# Altium PCB Thermostat_EEM_Breakout.PCBDOC
Units mm, origin at the board's own origin, x right, y up, seen from the top; angles counter-clockwise.
Board outline 44.91 x 73.5 mm, 4 copper layers (TOP, G1, L2, BOT), stack 1.55 mm thick; 66 components, 42 nets, 369 pads, 18 vias.
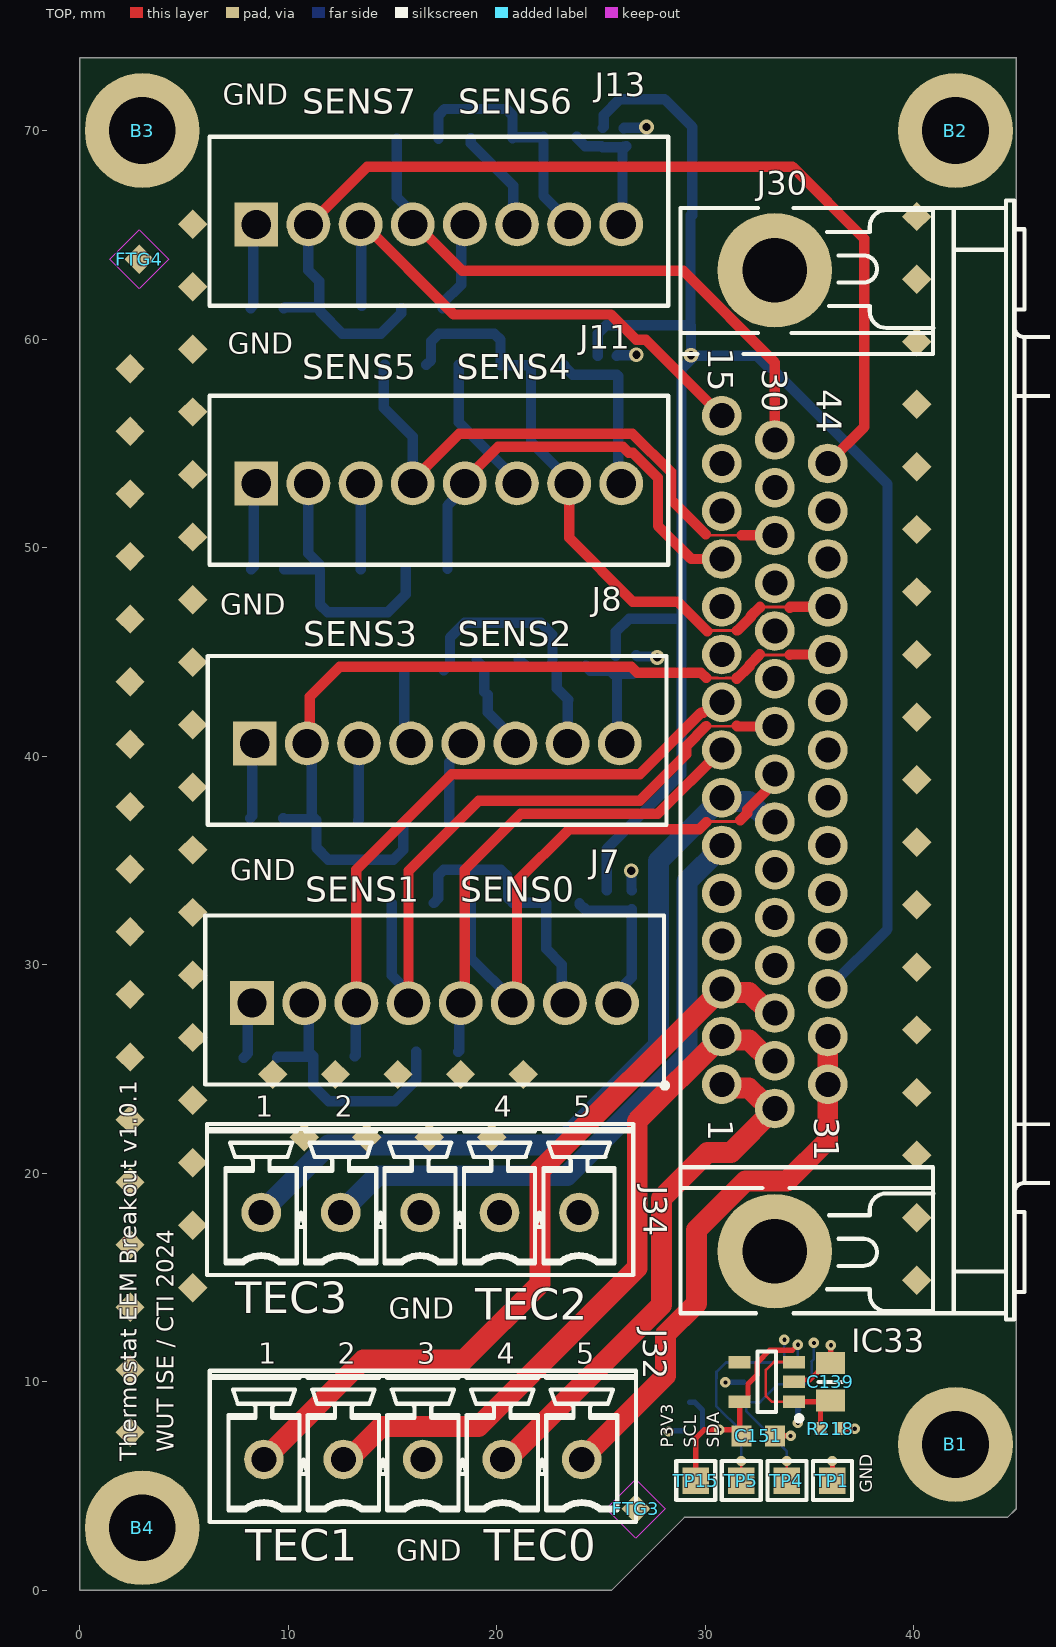
[diagram p0: TOP view]
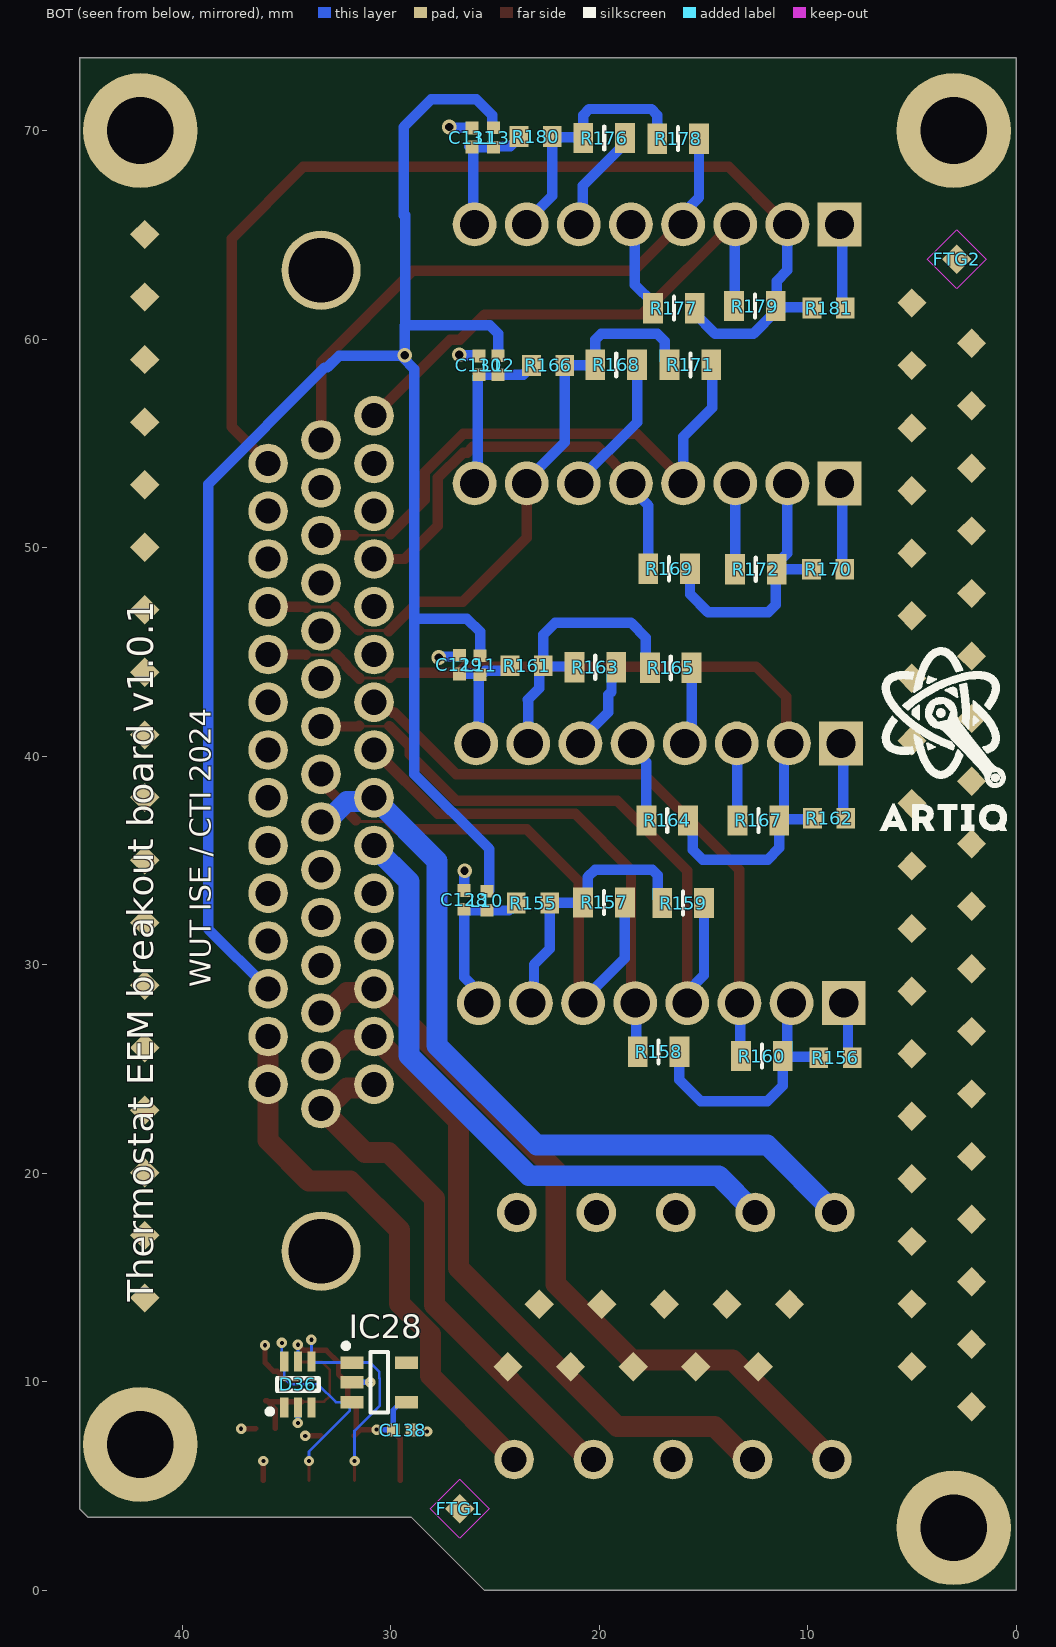
[diagram p1: BOT view, seen from below]
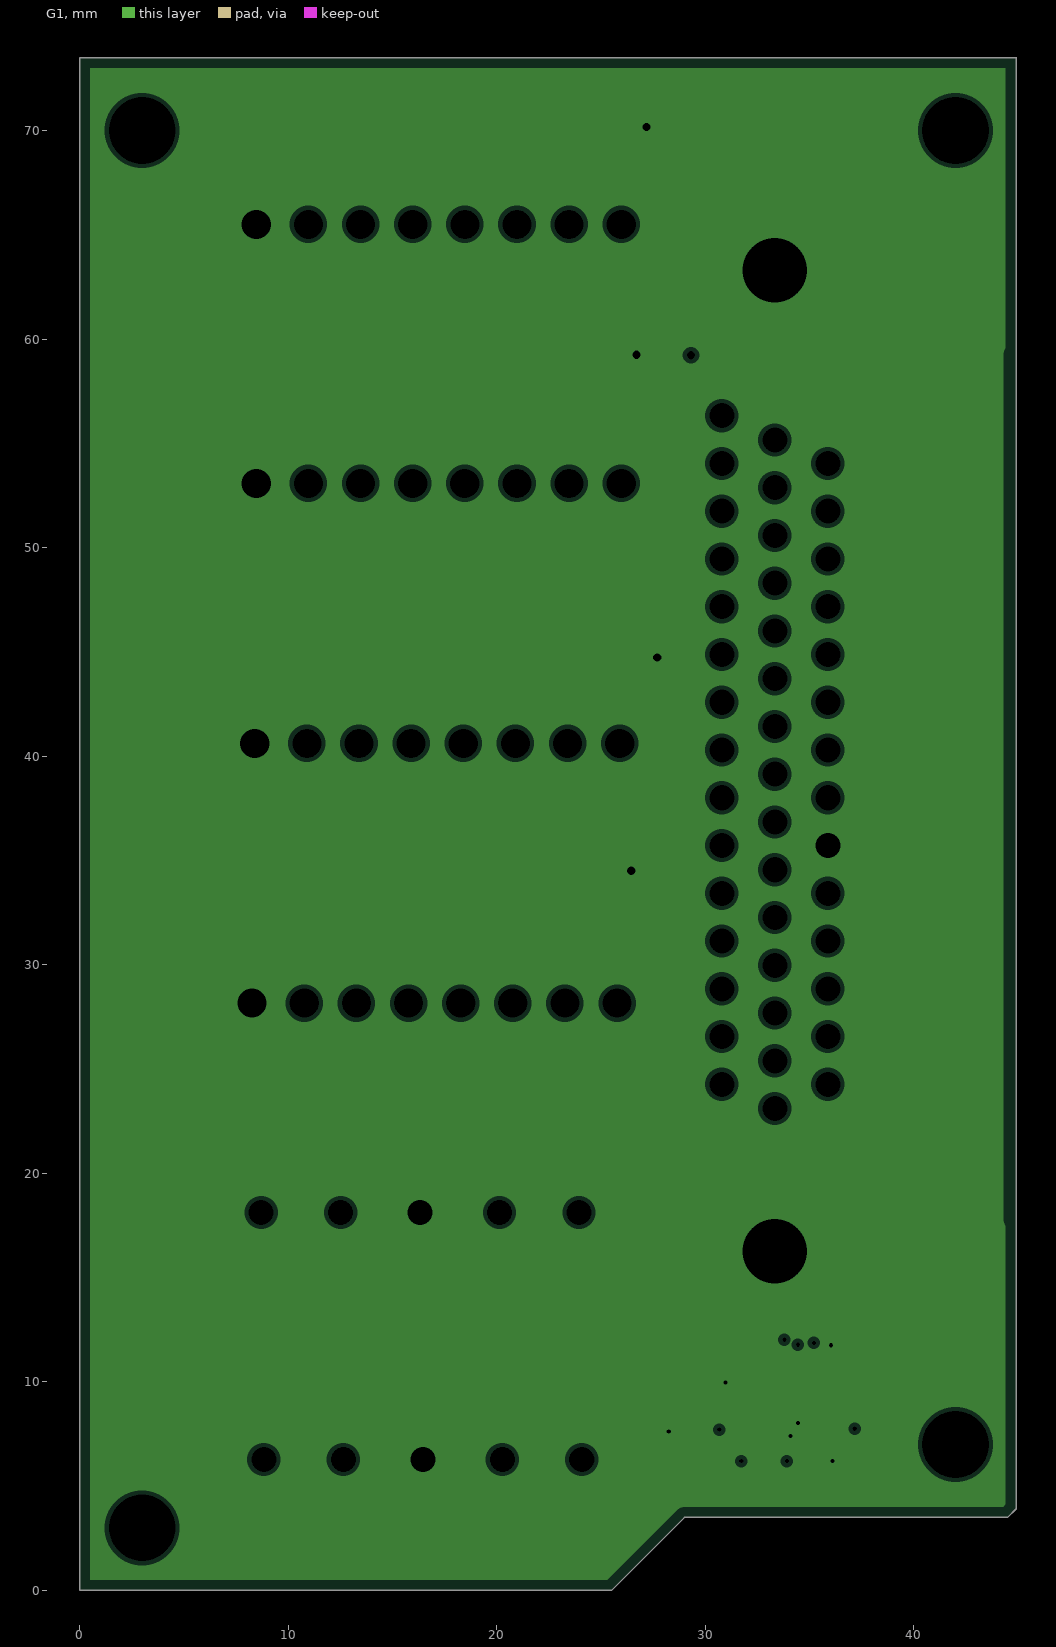
[diagram p2: G1, clearances drawn from the general rule]
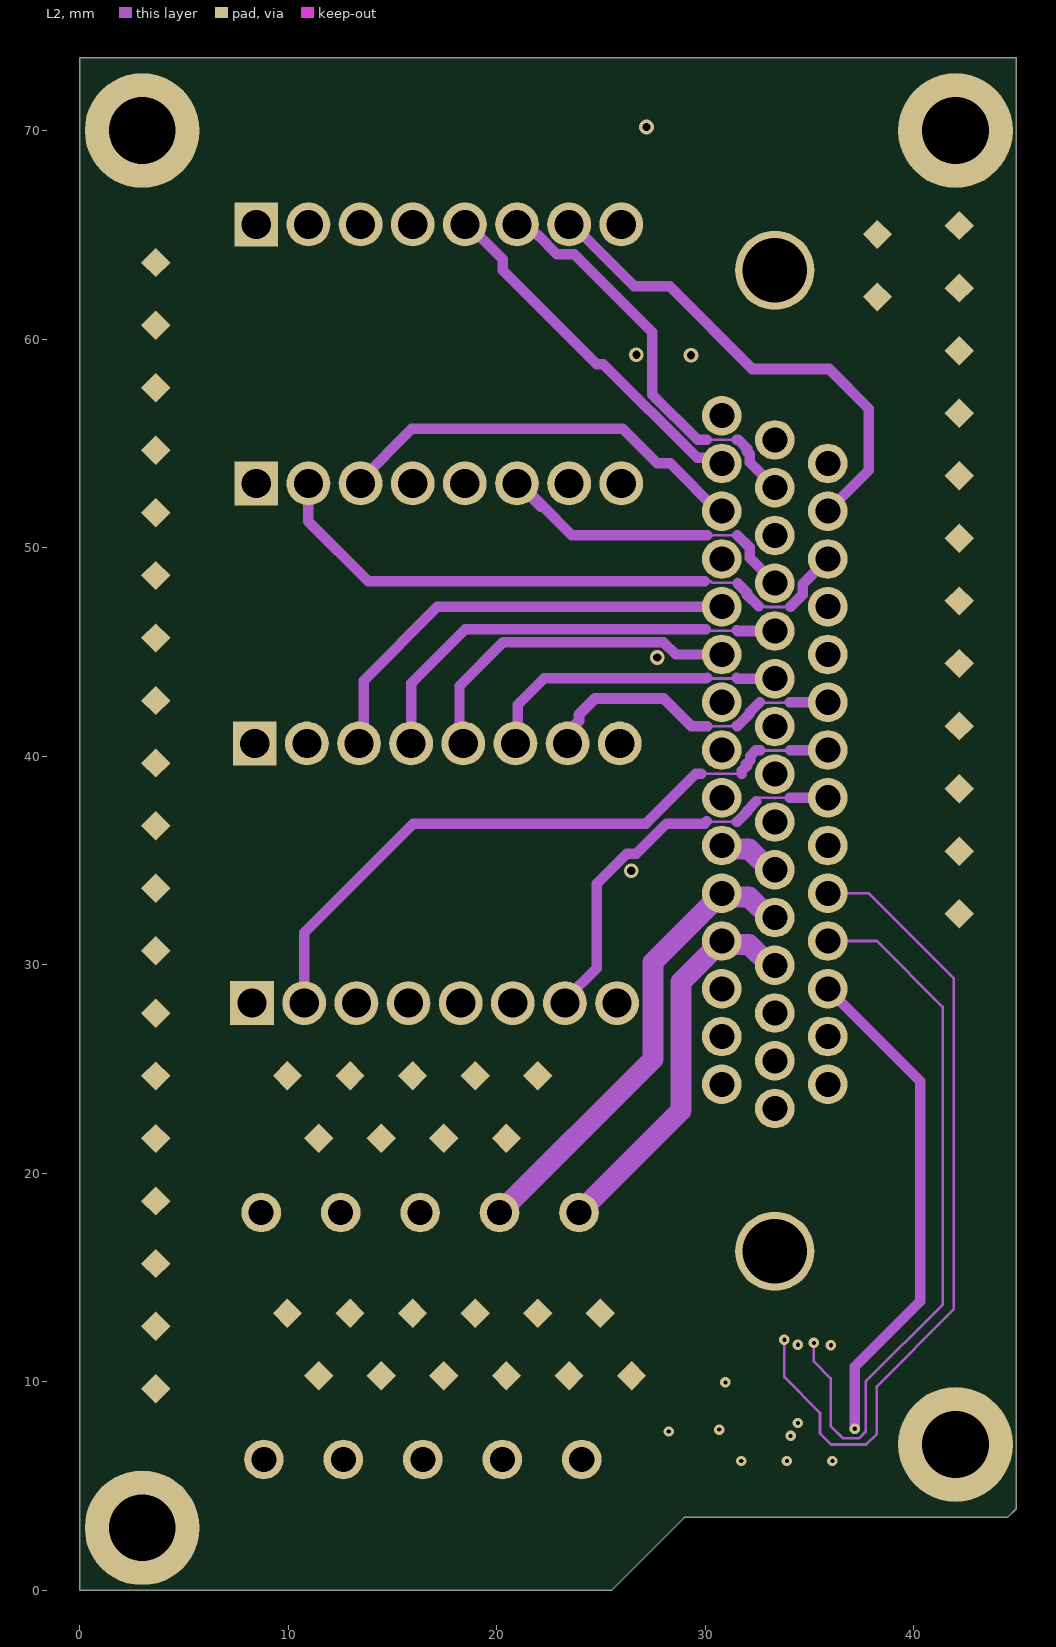
[diagram p3: L2]

## Layer stack, top to bottom
TopSolder: solder mask 0.01, Solder Resist, Dk 3.5
TOP: signal copper 0.035
Dielectric1: prepreg 0.18, FR-4, Dk 4.8
G1: plane copper 0.035, net GND
Dielectric2: core 1.05, Core-042, Dk 4.6
L2: signal copper 0.035
Dielectric3: prepreg 0.18, FR-4, Dk 4.8
BOT: signal copper 0.035
BottomSolder: solder mask 0.01, Solder Resist, Dk 3.5

## Board outline
0,0 0,73.5 44.901,73.5 44.913,73.487 44.913,3.913 44.5,3.5 29,3.5 25.5,0

## Design rules (kind name [scope] priority, off if disabled: settings)
AcuteAngle [All] p1: minimum=6.00000000000000E+0001 checktracksonly=FALSE
Clearance Clearance_HV [InNetClass('HV') vs not InNetClass('HV')] p1: gap=1 ignorepadtopadclearanceinfootprint=FALSE
Clearance Clearance_balancing [InNamedPolygon('balancing')] p2: gap=1.27 ignorepadtopadclearanceinfootprint=FALSE except(0.635: Via-Via Via-Fill Via-Poly Via-Region Via-Text Via-Hole)
Clearance Clearance_DIFF [(InDifferentialPairClass('All Differential Pairs')and IsTrack ) vs (InDifferentialPairClass('All Differential Pairs') and IsTrack  )] p3 off: gap=0.508 ignorepadtopadclearanceinfootprint=FALSE except(0: Arc-Hole Track-Hole SMDPad-Hole THPad-Hole Via-Hole Fill-Hole Poly-Hole Region-Hole Text-Hole; 0.127: SMDPad-SMDPad SMDPad-THPad SMDPad-Via SMDPad-Fill SMDPad-Poly SMDPad-Region SMDPad-Text THPad-THPad THPad-Via THPad-Fill THPad-Poly THPad-Region THPad-Text Via-Via Via-Fill Via-Poly Via-Region Via-Text)
Clearance [All] p4: gap=0.127 ignorepadtopadclearanceinfootprint=FALSE except(0: Arc-Hole Track-Hole SMDPad-Hole THPad-Hole Via-Hole Fill-Hole Poly-Hole Region-Hole Text-Hole; 0.203: Arc-Poly Track-Poly SMDPad-Poly THPad-Poly Via-Poly Fill-Poly Poly-Poly)
ComponentClearance [All] p1: gap=0 collisioncheckmode=3 verticalgap=0 showdistances=FALSE
DiffPairsRouting [All] p1: maxlimit=0.152 minlimit=0.127 mostfreqgap=0.152 toplayer_minwidth=0.127 toplayer_maxwidth=0.17 toplayer_prefwidth=0.152 midlayer1_minwidth=0.127 midlayer1_maxwidth=0.152 midlayer1_prefwidth=0.152 bottomlayer_minwidth=0.127 bottomlayer_maxwidth=0.17 bottomlayer_prefwidth=0.152 maxuncoupledlength=12.7
FabricationTestPointUsage TestPointUsage [All] p1: valid=0 allowmultiple=FALSE
FabricationTestpoint Testpoint [All] p1: side=3 testpointundercomponent=TRUE minsize=1.016 maxsize=2.54 preferedsize=1.524 minholesize=0.508 maxholesize=1.016 preferedholesize=0.813 testpointgrid=0.025 allowsidetop=TRUE allowsidebottom=TRUE usegrid=TRUE gridtolerance=0
Height [All] p1: minheight=0 maxheight=40 prefheight=40
HoleSize [All] p1: absolutevalues=TRUE maxlimit=3.81 minlimit=0.025 maxpercent=80.000 minpercent=20.000
HoleToHoleClearance [All] p1: gap=0.025 allowstackedmicrovias=TRUE
MinimumSolderMaskSliver [All] p1: minsoldermaskwidth=0
PlaneClearance PlaneClearance_HV [InNetClass('HV')] p1: clearance=1
PlaneClearance [All] p2: clearance=0.2
PlaneConnect [All] p1: pad.planeconnectstyle=Relief pad.reliefexpansion=0.254 pad.reliefentries=4 pad.reliefconductorwidth=0.254 pad.reliefairgap=0.152 via.planeconnectstyle=Direct via.reliefexpansion=0.508 via.reliefentries=4 via.reliefconductorwidth=0.254 via.reliefairgap=0.254
PolygonConnect PolygonConnect_Power [InComponent('C155') or InComponent('C156') or  InComponent('C157') or  InComponent('C158') or InComponent('C163') or InComponent('C164')  or InComponent('C165')or InComponent('C167') or InComponent('L2_1')  or InComponent('L2_2') or InComponent('L2_3') or InComponent('L2_4')    or InComponent('L4_1')  or InComponent('L4_2') or InComponent('L4_3') or InComponent('L4_4')] p1: connectstyle=Relief reliefconductorwidth=0.4 reliefentries=4 polygonreliefangle="90 Angle" airgapwidth=0.254
PolygonConnect PolygonConnect_BGA [HasFootprint('LGA25C127P5X5_625X625X192')] p2: connectstyle=Direct reliefconductorwidth=0.254 reliefentries=4 polygonreliefangle="90 Angle" airgapwidth=0.254
PolygonConnect PolygonConnect_pad [All] p3: thpad.connectstyle=Relief thpad.reliefconductorwidth=0.254 thpad.reliefentries=4 thpad.polygonreliefangle="90 Angle" thpad.airgapwidth=0.152 smdpad.connectstyle=Relief smdpad.reliefconductorwidth=0.254 smdpad.reliefentries=4 smdpad.polygonreliefangle="90 Angle" smdpad.airgapwidth=0.152 via.connectstyle=Direct via.reliefconductorwidth=0.254 via.reliefentries=4 via.polygonreliefangle="90 Angle" via.airgapwidth=0.152
RoomDefinition Thermostat_EEM_Breakout [InComponentClass('Thermostat_EEM_Breakout')] p1: confinementstyle=ConfineIn formatcopy=TRUE lockcomponents=FALSE outline 116.096,61.75 69.596,61.75 69.596,44 116.096,44
RoutingVias RoutingVias_HPOW [InNetClass('HPOW')] p1: holewidth=0.711 width=1.27 viastyle="Through Hole" minholewidth=0.711 minwidth=1.27 maxholewidth=0.711 maxwidth=1.27 useviatemplates=TRUE viatemplateguid#1={C4BC9E51-A50C-4827-9BB3-4603308538B4} viatemplateguid#2={CC3703E4-4F4D-4ECC-8BAE-5075FE03B580} viatemplateguid#3={B5D767B0-96F0-490E-9621-DF468C9DD5C8} viatemplatename#1=v50h20m0mx0 viatemplatename#2=v70h40m0mx0 viatemplatename#3=v66h33m0mx0
RoutingVias [All] p2: holewidth=0.2 width=0.5 viastyle="Through Hole" minholewidth=0.2 minwidth=0.5 maxholewidth=1 maxwidth=2 useviatemplates=TRUE viatemplateguid#1={C4BC9E51-A50C-4827-9BB3-4603308538B4} viatemplateguid#2={CC3703E4-4F4D-4ECC-8BAE-5075FE03B580} viatemplateguid#3={A86ABFB5-DEF7-4A39-8B53-0CFF0DEED7D0} viatemplateguid#4={09B06083-E995-414E-AB37-2F7DC4B9C6DF} viatemplateguid#5={C0EBE885-0A75-4383-AABD-E9C68A6ADC0C} viatemplateguid#6={B5D767B0-96F0-490E-9621-DF468C9DD5C8} viatemplateguid#7={4937D8D9-3ACA-4365-854C-C932E18BD1B1} viatemplatename#1=v50h20m0mx0 viatemplatename#2=v70h40m0mx0 viatemplatename#3=v60h30 viatemplatename#4=v60h30m0mx0 viatemplatename#5=v60h30m0mx0(1) viatemplatename#6=v66h33m0mx0 viatemplatename#7=v50h20m55mx0
SilkToSilkClearance [All] p1: silktosilkclearance=0
SilkToSolderMaskClearance SilkscreenOverComponentPads [IsPad] p1: minsilkscreentomaskgap=0 clearancetoexposedcopper=TRUE
SolderMaskExpansion [All] p1: expansion=0.015 istentingtop=FALSE
ViasUnderSMD ViasUnderSMD_QFN [HasFootprint('TSSOP28-EP')  or InComponent('IC11') or InComponent('IC18')  or InComponent('IC15') or InComponent('S1') or InComponent('S2') or InComponent('S3') or InComponent('S4')] p1: allowed=TRUE
ViasUnderSMD [All] p2: allowed=FALSE
Width Width_HPOW [InNetClass('HPOW')] p1: maxlimit=4 minlimit=0.254 preferedwidth=0.5
Width [All] p2: maxlimit=1.27 minlimit=0.127 preferedwidth=0.127
18 further rules are at their usual default settings.

## Components (designator, comment, footprint, x,y, rotation, side; value= is the part's Value field where it differs from the comment)
B1 "Plated Hole" MTG320_550#1 87.351,-11.091 r90 top
B2 "Plated Hole" MTG320_550#2 80.551,-11.091 r90 top
B3 "Plated Hole" MTG320_550#3 73.751,-11.091 r90 top
B4 "Plated Hole" MTG320_550#4 66.95,-11.091 r90 top
C128 "100nF" CAPC1005X55N 26.473,33.114 r270 bottom
C129 "100nF" CAPC1005X55N 26.702,44.391 r270 bottom
C130 "100nF" CAPC1005X55N 25.762,58.742 r270 bottom
C131 "100nF" CAPC1005X55N 26.092,69.664 r270 bottom
C138 "100nF" CAPC1005X55N 29.422,7.687 r0 bottom
C139 "10uF" CAPC2012X135N 36,10 r90 top
C151 "1uF" CAPC1608X87N 32.542,7.411 r180 top
D36 "DRTR5V0U4S-7" SOT65P210X110-6N 34.443,9.877 r90 bottom
FTG1 "Use only in PCB" FIDUCIAL_TOP_S100-200 26.679,3.912 r90 bottom
FTG2 "Use only in PCB" FIDUCIAL_TOP_S100-200 2.858,63.827 r90 bottom
FTG3 "Use only in PCB" FIDUCIAL_TOP_S100-200 26.679,3.912 r90 top
FTG4 "Use only in PCB" FIDUCIAL_TOP_S100-200 2.858,63.827 r90 top
IC28 "24AA02E48T-I/OT" SOT95P280X145-5N 30.543,9.977 r180 bottom
IC33 "ADP150AUJZ-3.3-R7" SOT95P280X90-5N 32.95,10 r180 top
J7 "691382000008" 691382000008 17.023,28.312 r0 top
J8 "691382000008" 691382000008 17.148,40.763 r0 top
J11 "691382000008" 691382000008 17.223,53.232 r0 top
J13 "691382000008" 691382000008 17.225,65.653 r0 top
J17 "691381000008" WURTH_691381000008 -5.854,-26.627 r270 top
J18 "691381000008" WURTH_691381000008 -27.952,-26.246 r270 top
J28 "691381000008" WURTH_691381000008 -27.037,-12.809 r270 top
J29 "691381000008" WURTH_691381000008 16.067,-26.195 r270 top
J30 "D-Sub" AMPHENOL_10090926-P444XLF 33.336,39.788 r270 top locked
J31 "" PHOENIX_1803604 -1.104,-6.917 r270 top
J32 "" PHOENIX_1803455 16.459,6.28 r0 top
J33 "" PHOENIX_1803604 15.736,-31.809 r90 top
J34 "" PHOENIX_1803455 16.328,18.119 r0 top
L10 "220R@100MHz" INDC1005X55N 25.381,33.063 r90 bottom
L11 "220R@100MHz" INDC1005X55N 25.711,44.366 r90 bottom
L12 "220R@100MHz" INDC1005X55N 24.847,58.742 r90 bottom
L13 "220R@100MHz" INDC1005X55N 25.076,69.664 r90 bottom
R155 "0" RESC1608X55N 23.171,32.961 r0 bottom
R156 "0" RESC1608X55N 8.668,25.545 r0 bottom
R157 "5k" RESC2013X64N 19.767,32.987 r0 bottom
R158 "5k" RESC2013X64N 17.151,25.824 r180 bottom
R159 "5k" RESC2013X64N 15.973,32.961 r0 bottom
R160 "5k" RESC2013X64N 12.198,25.621 r180 bottom
R161 "0" RESC1608X55N 23.476,44.341 r0 bottom
R162 "0" RESC1608X55N 8.972,37.025 r0 bottom
R163 "5k" RESC2013X64N 20.183,44.264 r0 bottom
R164 "5k" RESC2013X64N 16.735,36.924 r180 bottom
R165 "5k" RESC2013X64N 16.567,44.239 r0 bottom
R166 "0" RESC1608X55N 22.447,58.742 r0 bottom
R167 "5k" RESC2013X64N 12.36,36.924 r180 bottom
R168 "5k" RESC2013X64N 19.183,58.768 r0 bottom
R169 "5k" RESC2013X64N 16.643,48.989 r180 bottom
R170 "0" RESC1608X55N 9.023,48.963 r0 bottom
R171 "5k" RESC2013X64N 15.627,58.768 r0 bottom
R172 "5k" RESC2013X64N 12.487,48.963 r180 bottom
R176 "5k" RESC2013X64N 19.758,69.639 r0 bottom
R177 "5k" RESC2013X64N 16.415,61.486 r180 bottom
R178 "5k" RESC2013X64N 16.211,69.614 r0 bottom
R179 "5k" RESC2013X64N 12.528,61.587 r180 bottom
R180 "0" RESC1608X55N 23.044,69.715 r0 bottom
R181 "0" RESC1608X55N 8.998,61.486 r0 bottom
R218 "33" RESC1005X40N 36,7.761 r180 top
SCREW1 "09670009972" 3M_3341-31 56.105,15.884 r0 top
SCREW2 "09670009972" 3M_3341-31 56.175,63.9 r0 top
TP1 "Test Point" TPS127 36.1,5.27 r90 top
TP4 "Test Point" TPS127 33.914,5.27 r90 top
TP5 "Test Point" TPS127 31.728,5.27 r90 top
TP15 "Test Point" TPS127 29.542,5.27 r90 top

## Footprints (in the part's own frame and the unit in brackets; to place one, negate y for a bottom-side part, rotate by r counter-clockwise, add the part's x,y. Pads: shape width x height; smd on the part's side, far side on the other; paste and mask are expansions set on the pad)
3M_3341-31 [mm] "MDR Female Screw Locks : Thread Length= 3.8mm, Thread Size: M2.5"
  silkscreen extent -4.04,-2.74 5.26,2.74, body extent -9.01,-2.74 5.26,2.74, height 2.37
691382000008 [mm] "Vertical PCB Header, pitch 2.5mm, 08p"
  rect 2.1x2.1 hole 1.4: 1(-8.75,-0.15)
  round 2.1 hole 1.4: 2(-6.25,-0.15) 3(-3.75,-0.15) 4(-1.25,-0.15) 5(1.25,-0.15) 6(3.75,-0.15) 7(6.25,-0.15) 8(8.75,-0.15)
  silkscreen extent -11,-4.05 11,4.05, body extent -11,-4.05 11,4.05, height 10.14
AMPHENOL_10090926-P444XLF [mm] "Right Angle High Density D-sub 44 Male Contacts with Harpoons + UNC 4-40 Clinchnuts + Electrical Continuity"
  round 1.9 hole 1.2: 1(15.52,-2.54) 2(13.23,-2.54) 3(10.94,-2.54) 4(8.65,-2.54) 5(6.36,-2.54) 6(4.07,-2.54) 7(1.78,-2.54) 8(-0.51,-2.54) 9(-2.8,-2.54) 10(-5.09,-2.54) 11(-7.38,-2.54) 12(-9.67,-2.54) 13(-11.96,-2.54) 14(-14.25,-2.54) 15(-16.54,-2.54) 16(16.682,0) 17(14.392,0) 18(12.102,0) 19(9.812,0) 20(7.522,0) 21(5.232,0) 22(2.942,0) 23(0.652,0) 24(-1.638,0) 25(-3.928,0) 26(-6.218,0) 27(-8.508,0) 28(-10.798,0) 29(-13.088,0) 30(-15.378,0) 31(15.52,2.54) 32(13.23,2.54) 33(10.94,2.54) 34(8.65,2.54) 35(6.36,2.54) 36(4.07,2.54) 37(1.78,2.54) 38(-0.51,2.54) 39(-2.8,2.54) 40(-5.09,2.54) 41(-7.38,2.54) 42(-9.67,2.54) 43(-11.96,2.54) 44(-14.25,2.54)
  round 5.5 / inner round 3.8 / far side round 3.8 hole 3.1: 45(-23.513,0) 46(23.527,0)
  silkscreen extent -26.86,-5.4 26.8,17.18, body extent -26.86,-4.57 26.8,17.13, height 12.55
CAPC1005X55N [mm] "Capacitor, Non-Polarized, Chip; 1.00mm L X 0.50mm W X 0.70mm H, IPC Medium Density"
  rect 0.62x0.62 smd: 1(-0.45,0) 2(0.45,0)
  body extent -0.52,-0.27 0.53,0.28, height 0.55
CAPC1608X87N [mm] "Chip Capacitor, Body 1.6x0.8mm IPC Medium Density"
  rect 0.95x1 smd: 1(-0.8,0) 2(0.8,0)
  body extent -0.87,-0.47 0.88,0.48, height 0.87
CAPC2012X135N [mm] "Chip Capacitor, Body 2.0x1.25mm, IPC Medium Density"
  rect 1.05x1.4 smd: 1(-0.9,0) 2(0.9,0)
  silkscreen extent 0,-0.58 0,0.58, body extent -1.05,-0.67 1.05,0.68, height 1.25
FIDUCIAL_TOP_S100-200 [mm] "Square Fiducial Target, Top Layer, 1.0mm, Top Solder 2.0mm, Keepout =2.0mm"
  rect 1x1 smd rot 45 paste-0.51 mask+0.5: 1(0,0)
  TOP keep-out region: 1.414,0 0,-1.414 -1.414,0 0,1.414
INDC1005X55N [mm] "Chip Inductor, 2-Leads, EIA 0402, Metric 1005, Body 1x0.5mm, 0402IPC Medium Density"
  rect 0.6x0.62 smd: 1(-0.46,0) 2(0.46,0)
  body extent -0.52,-0.27 0.53,0.28, height 0.55
MTG320_550#1 [mm] "Plated Through Hole: Hole Dia.=3.2mm Pad Dia.=5.5mm"
  round 5.5 hole 3.2: 1(18.091,45.351)
MTG320_550#2 [mm] "Plated Through Hole: Hole Dia.=3.2mm Pad Dia.=5.5mm"
  round 5.5 hole 3.2: 1(81.091,38.551)
MTG320_550#3 [mm] "Plated Through Hole: Hole Dia.=3.2mm Pad Dia.=5.5mm"
  round 5.5 hole 3.2: 1(81.091,70.751)
MTG320_550#4 [mm] "Plated Through Hole: Hole Dia.=3.2mm Pad Dia.=5.5mm"
  round 5.5 hole 3.2: 1(14.091,63.95)
PHOENIX_1803455 [mm] "PCB Header, 8A, 160 V, Pitch: 3.81mm, 5 Positions, MCV Serie"
  round 1.9 hole 1.2: 1(-7.62,0) 2(-3.81,0) 3(0,0) 4(3.81,0) 5(7.62,0)
  silkscreen extent -10.22,-3 10.22,4.25, body extent -10.22,-3 10.22,4.25, height 9.2
PHOENIX_1803604 [mm] "3.85 5 way connector"
  silkscreen extent 7.82,-12.17 17.32,7.72, body extent 7,-12.17 18.1,7.67, height 18.6
RESC1005X40N [mm] "Chip Resistor, EIA 0402, Metric 1005, Body 1.0x0.5mm, IPC Medium Density"
  rect 0.58x0.62 smd: 1(-0.47,0) 2(0.47,0)
  body extent -0.52,-0.27 0.53,0.28, height 0.4
RESC1608X55N [mm] "Chip Resistor, EIA 0603, Metric 1608, Body 1.6x0.8mm, IPC Medium Density"
  rect 0.9x1 smd: 1(-0.8,0) 2(0.8,0)
  body extent -0.87,-0.47 0.88,0.48, height 0.55
RESC2013X64N [mm] "Chip Resistor, EIA 0805, Metric 2013, Body 2.03x1.27mm, IPC Medium Density"
  rect 0.95x1.45 smd: 1(-1,0) 2(1,0)
  silkscreen extent 0,-0.55 0,0.55, body extent -1.02,-0.63 1.02,0.64, height 0.64
SOT65P210X110-6N [mm] "SOT363, SC70-6, SOT, 0.65mm Pitch, 6 Pin, 1.25mm W X 2.00mm L X 1.10mm H, IPC Medium Density"
  rect 0.95x0.4 smd: 1(-1.1,0.65) 2(-1.1,0) 3(-1.1,-0.65) 4(1.1,-0.65) 5(1.1,0) 6(1.1,0.65)
  silkscreen extent -1.42,-1 0.3,1.48, body extent -1.2,-1.1 1.2,1.1, height 1.1
SOT95P280X90-5N [mm] "SOT, 0.95mm Pitch; 5 Pin, 1.60mm W X 2.90mm L X 0.90mm H body, IPC Medium"
  rect 1.05x0.6 smd: 1(-1.3,0.95) 2(-1.3,0) 3(-1.3,-0.95) 4(1.3,-0.95) 5(1.3,0.95)
  silkscreen extent -1.68,-1.45 0.45,1.87, body extent -1.4,-1.5 1.4,1.5, height 0.9
SOT95P280X145-5N [mm] "SOT, 0.95mm pitch; 5 pin, 1.60mm W X 2.90mm L X 1.45mm H body, IPC Medium Density"
  rect 1.1x0.6 smd: 1(-1.3,0.95) 2(-1.3,0) 3(-1.3,-0.95) 4(1.3,-0.95) 5(1.3,0.95)
  silkscreen extent -1.73,-1.45 0.43,1.87, body extent -1.4,-1.5 1.4,1.5, height 1.45
TPS127 [mm] "1.27 x  1.27mm SMD Test Point Area"
  rect 1.27x1.27 smd paste-1.27: 1(0,0)
  silkscreen extent -0.94,-0.94 0.94,0.94
WURTH_691381000008 [mm] "2.5mm 8 way connector"
  silkscreen extent -0.02,-9.63 11.62,10.98, body extent -0.03,-9.6 11.77,11, height 23.6

## Part data
B1 B2 B3 B4: library part PLATED_HOLE3.2_PAD5.5, "Single Terminal Socket", Author="CERN DEM JMW", Component Type="Standard (No BOM)", ComponentHeight=0mm, CreateDate=01.10.2012, Family="Plated Hole", HelpURL=Undefined, LatestRevisionDate=01.10.2012, Mounted=No, PackageDescription="Plated Through Hole: Hole Dia.=3.2mm Pad Dia.=5.5mm", Part Description="Plated Through Hole: Hole Dia.=3.2mm Pad Dia.=5.5mm", Part Number=PLATED_HOLE3.2_PAD5.5, Pin Count=1, Sense=No, SMD=No, Socket=No, Status=None
C128 C129 C130 C131 C138: library part CC0402_100NF_16V_10%_X5R, "Non-polarised capacitor", Case=0402, Manufacturer=GENERIC, Manufacturer1 ComponentHeight=0.55mm, Manufacturer1 Example=MURATA, Manufacturer1 Part Number=GRM155R61C104KA88D, Tolerance=±10%, Voltage=16V, Author="CERN DEM JLC", Component Type=Standard, CreateDate=10.12.2013, HelpURL=\\cern.ch\dfs\Applications\Altium\Datasheets\CC0402_X5R_MURATA_GRM.pdf, LatestRevisionDate=10.12.2013, Manufacturer Part Number=CC0402_100NF_16V_10%_X5R, Mounted=Yes, Part Description="SMD Multilayer Chip Ceramic Capacitor", Part Number=CC0402_100NF_16V_10%_X5R, Pin Count=2, Sense=No, SMD=Yes, Socket=No, Status=None, TC=X5R
C139: library part CC0805_10UF_16V_10%_X5R, "Non-polarised capacitor", Case=0805, Manufacturer=GENERIC, Manufacturer1 ComponentHeight=1.4mm, Manufacturer1 Example=KEMET, Manufacturer1 Part Number=C0805C106K4PAC, Tolerance=±10%, Voltage=16V, Author="CERN DEM JLC", Component Type=Standard, CreateDate=03.12.2007, HelpURL=\\cern.ch\dfs\Applications\Altium\Datasheets\CC1206_X5R_KEMET.pdf, LatestRevisionDate=03.12.2007, Manufacturer Part Number=CC0805_10UF_16V_10%_X5R, Mounted=Yes, Part Description="SMD Multilayer Chip Ceramic Capacitor", Part Number=CC0805_10UF_16V_10%_X5R, Pin Count=2, Sense=No, SMD=Yes, Socket=No, Status=Preferred, TC=X5R
C151: library part CC0603_1UF_25V_10%_X7R, "Non-polarised capacitor", Case=0603, Manufacturer=GENERIC, Manufacturer1 ComponentHeight=0.9mm, Manufacturer1 Example=MURATA, Manufacturer1 Part Number=GRM188R71E105KA12D, Tolerance=±10%, Voltage=25V, Author="CERN DEM JLC", Component Type=Standard, CreateDate=18/01/2011, HelpURL=\\cern.ch\dfs\Applications\Altium\Datasheets\CC0603_X7R_MURATA.pdf, LatestRevisionDate=18/01/2011, Manufacturer Part Number=CC0603_1UF_25V_10%_X7R, Mounted=Yes, Part Description="SMD Multilayer Chip Ceramic Capacitor", Part Number=CC0603_1UF_25V_10%_X7R, Pin Count=2, Sense=No, SMD=Yes, Socket=No, Status=None, TC=X7R
D36: library part D_TVS_DRTR5V0U4S-7, "Integrated Quad Ultra-Low Capacitance ESD Protection", Case=SOT363, Manufacturer=DIODES, Author=GK, Bonding=No, Component Type=Standard, ComponentHeight=1.1mm, CreateDate=24.01.2017, Device=DRTR5V0U4S-7, HelpURL=\\cern.ch\dfs\Applications\Altium\Datasheets\PRTR5V0U4Y.pdf, LatestRevisionDate=14.09.2020, Manufacturer Part Number=DRTR5V0U4S-7, Mounted=Yes, PackageDescription="SOT363, SC70-6, 0.65mm Pitch; 6 Pin, 1.25mm W X 2.00mm L X 1.10mm H body, IPC Medium Density", Part Description="Integrated Quad Ultra-Low Capacitance ESD (±8kV) Protection", Part Number=DRTR5V0U4S-7, Pin Count=6, PressFit=No, Sense=No, SMD=Yes, Socket=No, Status=Active, Status Comment=Active
FTG1 FTG2 FTG3 FTG4: library part FIDUCIAL_TARGET_S100-200, "Fiducial Target", Author="CERN DEM JLC", Component Type="Standard (No BOM)", ComponentHeight=0mm, CreateDate=09.02.2010, Family=Fiducial, HelpURL=Undefined, LatestRevisionDate=04.04.2012, Mounted=No, PackageDescription="Square Fiducial Target, Top Layer, 1.0mm, Top Solder 2.0mm, Keepout =2.0mm", Part Description="Square Fiducial Target, Top Layer, 1.0mm, Top Solder 2.0mm, Keepout =2.0mm", Part Number=FIDUCIAL_TARGET_S100-200, Pin Count=1, Sense=No, SMD=Yes, Socket=No, Status=None
IC28: "1.7V-5.5V, 2K I2C Serial EEPROM With EUI-48 Node Identity", Case=SOT23-5, Manufacturer="MICROCHIP TECHNOLOGY", Author="CERN DEM MR", Bonding=No, Component Type=Standard, ComponentHeight=1.45mm, CreateDate=31.03.2016, Device=24AA02E48T-I/OT, HelpURL=\\cern.ch\dfs\Applications\Altium\Datasheets\24AA02E48T-I-OT.pdf, LatestRevisionDate=31.03.2016, Manufacturer Part Number=24AA02E48T-I/OT, Mounted=Yes, PackageDescription="SOT, 0.95mm pitch; 5 pin, 1.60mm W X 2.90mm L X 1.45mm H body, IPC Medium Density", Part Description="1.7V-5.5V, 2K I2C Serial EEPROM With EUI-48 Node Identity", Part Number=24AA02E48T-I/OT, Pin Count=5, PressFit=No, Sense=No, SMD=Yes, Socket=No
IC33: "Ultralow Noise, 150 mA CMOS Linear Regulator", Case=SOT23, Manufacturer="ANALOG DEVICES", Author="CERN DEM JLC", Bonding=No, Component Type=Standard, ComponentHeight=0.9mm, CreateDate=27/09/2011, Device=ADP150AUJZ-3.3-R7, HelpURL=\\cern.ch\dfs\Applications\Altium\Datasheets\ADP150AUJZ-3.3-R7.pdf, LatestRevisionDate=19/06/2014, Manufacturer Part Number=ADP150AUJZ-3.3-R7, Mounted=Yes, PackageDescription="SOT23, 0.95mm pitch; 5 pin, 1.75mm W X 3.00mm L, IPC Medium Density", Part Description="3.3V, 150mA, Ultralow Noise, CMOS Linear Regulator", Part Number=ADP150AUJZ-3.3-R7, Pin Count=5, PressFit=No, Sense=No, SMD=Yes, Socket=No
J7 J8 J11 J13: "WR-TBL Serie 382 Vertical PCB Header, Pluggable, pitch 2.5mm, 8p", Operating Temperature="-40 to +105degC", Rated Current [UL]=12A, Working Voltage [UL]=300VAC, Application=Pluggable, Compliance=RoHS, ComponentLink1Description=Manufacturer, ComponentLink1URL=http://www.we-online.de, ComponentLink2Description=Datasheet, ComponentLink2URL=https://katalog.we-online.de/em/datasheet/691382000008.pdf, Modularity=No, Mounting Technology=THT, Packaging=Box, PCB/Cable/Panel=PCB, Pin Number=8, Pitch=2.5mm, Published Date="October 2019", Publisher="Wurth Elektronik", Type=Vertical
  J7 J8 J13: Part Number=691382000008
  J11: Manufacturer Part Number=691382000008
J17 J18 J28 J29: library part CON_TB_WURTH_691381000008, "Phoenix Contact 2.5 pitch terminal plug, 8 ways", Manufacturer=WURTH, Manufacturer Part Number=691381000008
J30: library part AMPHENOL_10090926-P444XLF, "Connector D-sub 44 Male", Manufacturer=AMPHENOL, Manufacturer Part Number=10090926-P444XLF, Author="CERN DEM BC", Component Type=Standard, ComponentHeight=12.8mm, CreateDate=22.10.2020, Family=D-Sub, HelpURL=\\cern.ch\dfs\Applications\Altium\Datasheets\AMPHENOL_10090926-P444XLF.pdf, LatestRevisionDate=22.10.2020, Mounted=Yes, Part Description="Right Angle High Density D-sub 44 Male Contacts with Harpoons + UNC 4-40 Clinchnuts + Electrical Continuity", Part Number=AMPHENOL_10090926-P444XLF, Pin Count=46, PressFit=No, Sense=No, SMD=No, Socket=No, Status=None
J31 J33: library part PHOENIX_1803604, "Phoenix Contact 3.81 pitch terminal plug, 5 ways", Manufacturer="Phoenix Contact", Manufacturer Part Number="MC 1,5/ 5-ST-3,81 1803604", Mates with=PHOENIX_1803303
J32 J34: library part PHOENIX_1803455, "Connector 5 Male", Manufacturer="PHOENIX CONTACT", Manufacturer Part Number="1803455 (MCV 1,5/ 5-G-3,81)", Author="CERN DEM JLC", Component Type=Standard, ComponentHeight=9.2mm, CreateDate=04.11.2013, HelpURL=\\cern.ch\dfs\Applications\Altium\Datasheets\PHOENIX_1803455.pdf, LatestRevisionDate=04.11.2013, Mounted=Yes, Part Description="8A 160 V, Pitch: 3.81mm, 5 Positions Header", Part Number=PHOENIX_1803455, Pin Count=5, PressFit=No, Sense=No, SMD=No, Socket=No, Status=None
L10 L11 L12 L13: library part IND0402_MURATA_BLM15HB221SN1, Case=0402, Manufacturer=MURATA, Manufacturer Part Number=BLM15HB221SN1, Power=250mA, Resistance=1R, Tolerance=±25%, Author="CERN DEM JLC", Component Type=Standard, ComponentHeight=0.55mm, CreateDate=23.06.2009, HelpURL=\\cern.ch\dfs\Applications\Altium\Datasheets\IND0402_MURATA_BLM15H.pdf, LatestRevisionDate=25.10.2018, Mounted=Yes, Part Description="SMD EMIFIL Suppression Chip Ferrite Bead", Part Number=IND0402_MURATA_BLM15HB221SN1, Pin Count=2, Sense=No, SMD=Yes, Socket=No, Status=None
R155 R156 R161 R162 R166 R170 R180 R181: library part R0603_0R_JUMPER, "Resistor", Case=0603, Manufacturer=GENERIC, Manufacturer1 ComponentHeight=0.55mm, Manufacturer1 Example="NIC COMPONENT", Manufacturer1 Part Number=NRC06Z0, Author="CERN DEM JLC", Component Type=Standard, CreateDate=03.12.2007, HelpURL=\\cern.ch\dfs\Applications\Altium\Datasheets\R0603_NIC_NRC.pdf, LatestRevisionDate=13.03.2008, Manufacturer Part Number=R0603_0R_JUMPER, Mounted=Yes, Part Description="1A (0.05R Max DC Resistance) Zero Ohm Jumper", Part Number=R0603_0R_JUMPER, Pin Count=2, PressFit=No, Sense=No, SMD=Yes, Socket=No, Status=Preferred
R157 R158 R159 R160 R163 R164 R165 R167 R168 R169 R171 R172 R176 R177 R178 R179: library part R0805_5K_0.01%_0.2W_0.2PPM_VISHAY_VSMP, "Resistor - 0.01%", Case=0805, Manufacturer="VISHAY PRECISION", Manufacturer1 ComponentHeight=0.64mm, Manufacturer Part Number=Y16245K00000T9R, Power=0.2W, Tolerance=±0.01%, Author="CERN DEM JLC", Component Type=Standard, CreateDate=22.09.2011, HelpURL=\\cern.ch\dfs\Applications\Altium\Datasheets\R0805_VISHAY_VSMP.pdf, LatestRevisionDate=22.09.2011, Mounted=Yes, Part Description="Ultra High Precision Foil Wraparound Surface Mount Chip Resistor", Part Number=R0805_5K_0.01%_0.2W_0.2PPM_VISHAY_VSMP, Pin Count=2, PressFit=No, Sense=No, SMD=Yes, Socket=No, Status=None, TC=±0.2ppm/°C
R218: library part R0402_33R_1%_0.0625W_100PPM, "Resistor - 1%", Case=0402, Manufacturer=GENERIC, Manufacturer1 ComponentHeight=0.4mm, Manufacturer1 Example="YAGEO PHYCOMP", Manufacturer1 Part Number=232270673309L, Power=0.0625W, Tolerance=±1%, Author="CERN DEM JLC", Component Type=Standard, CreateDate=03/12/2007, HelpURL=\\cern.ch\dfs\Applications\Altium\Datasheets\R0402_Phycomp_RC0402.pdf, LatestRevisionDate=17/10/2012, Manufacturer Part Number=R0402_33R_1%_0.0625W_100PPM, Mounted=Yes, Part Description="General Purpose Thick Film Chip Resistor", Part Number=R0402_33R_1%_0.0625W_100PPM, Pin Count=2, PressFit=No, Sense=No, SMD=Yes, Socket=No, Status="Not Recommended", TC=±100ppm/°C
SCREW1 SCREW2: library part 3M_3341-31, "Female Screw Lock", Manufacturer=HARTING, Author=GK, Component Type=Mechanical, ComponentHeight=11mm, CreateDate=10.09.2013, HelpURL=\\cern.ch\dfs\Applications\Altium\Datasheets\TYCO_749087-2.pdf, LatestRevisionDate=10.09.2013, Manufacturer Part Number=09670009972, Mounted=Yes, PackageDescription="MDR Female Screw Locks, Thread Size: M2.5", Part Description="MDR Female Screw Locks, Thread Size: M2.5", Part Number=09670009972, Pin Count=0, PressFit=No, Sense=No, SMD=No, Socket=No, Status=None
TP1 TP4 TP5 TP15: library part SMD_PAD_1.27X1.27MM, Author="CERN DEM JLC", Component Type="Standard (No BOM)", ComponentHeight=0mm, CreateDate=12.01.2008, Family="Test Point", HelpURL=Undefined, LatestRevisionDate=12.01.2008, Mounted=No, PackageDescription="1.27mm x 1.27mm PCB Copper Area (SMD Test Point)", Part Description="1.27mm x 1.27mm PCB Copper Area (SMD Test Point)", Part Number=SMD_PAD_1.27X1.27MM, Pin Count=1, Sense=No, SMD=Yes, Socket=No, Status=None

## Free pads (board coordinates)
  rect 1x1 smd far side rot 135 paste-0.6 mask+0: BAL(2.145,14.804) BAL(2.145,26.804) BAL(2.145,53.804) BAL(2.145,8.804) BAL(2.145,11.804) BAL(2.145,17.804) BAL(2.145,20.804) BAL(2.145,23.804) BAL(2.145,29.804) BAL(2.145,32.804) BAL(2.145,35.804) BAL(2.145,38.804) BAL(2.145,41.804) BAL(2.145,44.804) BAL(2.145,47.804) BAL(2.145,50.804) BAL(2.145,56.804) BAL(2.145,59.804) BAL(5,16.736) BAL(5,28.736) BAL(5,55.736) BAL(5,10.736) BAL(5,13.736) BAL(5,19.736) BAL(5,22.736) BAL(5,25.736) BAL(5,31.736) BAL(5,34.736) BAL(5,37.736) BAL(5,40.736) BAL(5,43.736) BAL(5,46.736) BAL(5,49.736) BAL(5,52.736) BAL(5,58.736) BAL(5,61.736) BAL(41.782,20.022) BAL(41.782,32.022) BAL(41.782,59.022) BAL(41.782,14.022) BAL(41.782,17.022) BAL(41.782,23.022) BAL(41.782,26.022) BAL(41.782,29.022) BAL(41.782,35.022) BAL(41.782,38.022) BAL(41.782,41.022) BAL(41.782,44.022) BAL(41.782,47.022) BAL(41.782,50.022) BAL(41.782,53.022) BAL(41.782,56.022) BAL(41.782,62.022) BAL(41.782,65.022)
  rect 1x1 smd rot 135 paste-0.6 mask+0: BAL(2.418,7.577) BAL(2.418,10.577) BAL(2.418,13.577) BAL(2.418,19.577) BAL(2.418,22.577) BAL(2.418,25.577) BAL(2.418,31.577) BAL(2.418,34.577) BAL(2.418,37.577) BAL(2.418,40.577) BAL(2.418,46.577) BAL(2.418,49.577) BAL(2.418,52.577) BAL(2.418,58.577) BAL(2.418,16.577) BAL(2.418,28.577) BAL(2.418,43.577) BAL(2.418,55.577) BAL(5.422,14.508) BAL(5.422,17.508) BAL(5.422,20.508) BAL(5.422,26.508) BAL(5.422,29.508) BAL(5.422,32.508) BAL(5.422,38.508) BAL(5.422,41.508) BAL(5.422,44.508) BAL(5.422,47.508) BAL(5.422,53.508) BAL(5.422,56.508) BAL(5.422,59.508) BAL(5.422,65.508) BAL(5.422,23.508) BAL(5.422,35.508) BAL(5.422,50.508) BAL(5.422,62.508) BAL(40.146,14.875) BAL(40.146,17.875) BAL(40.146,20.875) BAL(40.146,26.875) BAL(40.146,29.875) BAL(40.146,32.875) BAL(40.146,38.875) BAL(40.146,41.875) BAL(40.146,44.875) BAL(40.146,47.875) BAL(40.146,53.875) BAL(40.146,56.875) BAL(40.146,59.875) BAL(40.146,65.875) BAL(40.146,23.875) BAL(40.146,35.875) BAL(40.146,50.875) BAL(40.146,62.875)
  rect 1x1 on Mid1 rot 135 paste-0.6 mask+0: BAL(3.65,9.664) BAL(3.65,12.664) BAL(3.65,15.671) BAL(3.65,18.671) BAL(3.65,21.671) BAL(3.65,24.671) BAL(3.65,27.671) BAL(3.65,30.671) BAL(3.65,33.671) BAL(3.65,36.671) BAL(3.65,39.671) BAL(3.65,42.671) BAL(3.65,45.671) BAL(3.65,48.671) BAL(3.65,51.671) BAL(3.65,54.671) BAL(3.65,57.671) BAL(3.65,60.671) BAL(3.65,63.671) BAL(38.257,62.022) BAL(38.257,65.022) BAL(42.177,32.447) BAL(42.177,35.447) BAL(42.177,38.447) BAL(42.177,41.447) BAL(42.177,44.447) BAL(42.177,47.447) BAL(42.177,50.447) BAL(42.177,53.447) BAL(42.177,56.447) BAL(42.177,59.447) BAL(42.177,62.447) BAL(42.177,65.447)
  rect 1x1 smd rot 45 paste-0.6 mask+0: BAL(9.268,24.739) BAL(10.768,21.739) BAL(12.268,24.739) BAL(13.768,21.739) BAL(15.268,24.739) BAL(16.768,21.739) BAL(18.268,24.739) BAL(19.768,21.739) BAL(21.268,24.739)
  rect 1x1 on Mid1 rot 45 paste-0.6 mask+0: BAL(9.968,13.289) BAL(9.968,24.677) BAL(11.468,10.289) BAL(11.468,21.677) BAL(12.968,13.289) BAL(12.968,24.677) BAL(14.468,10.289) BAL(14.468,21.677) BAL(15.968,13.289) BAL(15.968,24.677) BAL(17.468,10.289) BAL(17.468,21.677) BAL(18.968,13.289) BAL(18.968,24.677) BAL(20.468,10.289) BAL(20.468,21.677) BAL(21.968,13.289) BAL(21.968,24.677) BAL(23.468,10.289) BAL(24.968,13.289) BAL(26.468,10.289)
  rect 1x1 smd far side rot 45 paste-0.6 mask+0: BAL(10.871,13.72) BAL(12.371,10.72) BAL(13.871,13.72) BAL(15.371,10.72) BAL(16.871,13.72) BAL(18.371,10.72) BAL(19.871,13.72) BAL(21.371,10.72) BAL(22.871,13.72) BAL(24.371,10.72)

## Via types
v1: diameter 0.5, hole 0.2, TOP to BOT, tented both sides, 13 vias
v2: diameter 0.7, hole 0.4, TOP to BOT, tented both sides, 5 vias

## Nets (pads, with @x,y where several pads share a name; then routed paths per layer and width w, separated by ;. In a path a pad name is that pad's centre, name@x,y a point inside that pad or via, vN(x,y) a via of type N, cw(c..) or ccw(c..) an arc to the next point about the centre after c; other vN are vias at no path point)
BB_SCL: D36.4 IC28.1 J30.35 TP5.1 | length 49.7
  TOP w0.127: TP5.1 v1(31.728,6.205)
  L2 w0.127: v1(33.797,12.022) 33.793,12.018 33.793,10.222 35.5,8.515 35.5,7.53 36.03,7 37.72,7 38.228,7.508 38.228,9.788 41.916,13.477 41.916,29.355 37.843,33.428 J30.35
  BOT w0.127: v1(31.728,6.205) 31.728,7.649 30.528,8.85 30.528,10.16 30.543,10.175 30.543,10.477 30.993,10.927 IC28.1 33.743,10.927 D36.4 33.793,12.018 v1(33.797,12.022)
BB_SDA: D36.6 IC28.3 J30.34 TP4.1 | length 45.2
  TOP w0.127: TP4.1 v1(33.914,6.205)
  L2 w0.127: v1(35.212,11.87) 35.212,10.972 36.013,10.171 36.013,7.882 36.594,7.301 37.389,7.301 37.696,7.608 37.696,10.008 41.385,13.697 41.385,27.981 38.228,31.138 J30.34
  BOT w0.127: v1(33.914,6.205) 33.914,6.662 31.964,8.611 31.964,8.906 IC28.3 32.623,9.027 33.473,9.877 34.8,9.877 35.1,10.177 35.1,10.971 D36.6 35.212,11.096 v1(35.212,11.87)
GND: C128.1 C129.1 C130.1 C131.1 C138.1 C139.2 C151.1 D36.2 IC28.2 IC33.2 J7.1 J8.1 J11.1 J13.1 J30.36 J30.45 J30.46 J32.3 J34.3 R156.1 R162.1 R170.1 R181.1 TP1.1 | length 27
  TOP w0.254: C151.1 v1(34.092,7.411) ; IC33.2 34.335,10.085 35.007,10.085 35.425,10.502 35.602,10.502 36.023,10.923 v1(36.023,11.753) ; TP1.1 v1(36.1,6.205)
  BOT w0.127: D36.2 D36.2@34.561,8.66
  BOT w0.254: v1(28.248,7.621) 28.281,7.654 28.939,7.654 C138.1 ; v1(30.968,9.977) IC28.2 ; v1(34.443,8.027) D36.2
  BOT w0.5: R156.1 8.068,25.745 8.068,28.107 J7.1@8.273,28.312 ; R162.1 8.285,37.138 8.285,41.065 J8.1@8.236,41.115 ; R181.1 8.336,61.624 8.336,65.515 J13.1@8.475,65.653 ; R170.1 8.348,49.088 8.348,53.107 J11.1@8.473,53.232 ; C130.1 25.791,59.221 26.673,59.221 v2(26.702,59.25) ; C131.1 26.121,70.143 27.155,70.143 v2(27.184,70.172) ; v2(26.454,34.504) 26.463,34.494 26.463,33.573 C128.1 ; C129.1 26.762,44.781 27.59,44.781 27.638,44.733 v2(27.692,44.733)
NetC128_2: C128.2 J7.8 L10.1 R155.2 | length 7.3
  BOT w0.5: R155.2 23.971,32.911 24.171,32.711 24.221,32.711 24.329,32.603 L10.1 26.412,32.603 C128.2 26.473,29.391 25.773,28.691 J7.8@25.773,28.312
NetC129_2: C129.2 J8.8 L11.1 R161.2 | length 5.4
  BOT w0.5: R161.2 24.276,44.291 24.476,44.091 25.453,44.091 L11.1@25.609,43.934 ; J8.8@25.787,40.937 25.771,40.953 25.771,43.856 25.721,43.906 L11.1 25.761,43.956 26.52,43.956 C129.2@26.575,44.01
NetC130_2: C130.2 J11.8 L12.1 R166.2 | length 7.9
  BOT w0.5: R166.2 23.247,58.692 23.647,58.292 C130.2 25.822,58.232 25.822,53.384 J11.8@25.973,53.232
NetC131_2: C131.2 J13.8 L13.1 R180.2 | length 6.3
  BOT w0.5: R180.2 23.844,69.665 24.255,69.254 25.026,69.254 L13.1 C131.2@26.082,69.204 ; C131.2 C131.2@26.082,69.204 ; J13.8@26.194,65.6 26.033,65.761 26.033,69.156 C131.2@26.082,69.204 ; C131.2@26.219,69.258 26.165,69.204 C131.2@26.082,69.204
NetC139_1: C139.1 IC33.1 IC33.3 R218.2 | length 7.4
  TOP w0.127: IC33.1 33.183,9.05 32.91,9.323 32.91,10.568 33.292,10.95 IC33.3
  TOP w0.254: IC33.1 C139.1@35.878,9.05 ; R218.2 35.53,8.702 C139.1@35.878,9.05 ; C139.1 35.928,9.1 C139.1@35.878,9.05
P3V3_AFE: C138.2 C151.2 D36.5 IC28.4 IC33.5 TP15.1 | length 14.1
  TOP w0.254: TP15.1 29.542,7.293 29.947,7.698 30.66,7.698 v1(30.671,7.709) 31.443,7.709 C151.2@31.65,7.502 ; C151.2 C151.2@31.65,7.502 ; 33.588,11.518 34.171,11.518 34.431,11.778 v1(34.443,11.778) ; 33.588,11.518 33.091,11.518 32.5,10.927 32.5,10.35 32.048,9.898 32.048,9.223 31.875,9.05 IC33.5 C151.2@31.65,7.502
  BOT w0.127: D36.5 v1(34.443,11.778)
  BOT w0.254: IC28.4 29.493,9.027 29.872,8.649 C138.2 29.883,7.698 30.66,7.698 v1(30.671,7.709)
P5V0_AFE: J30.33 L10.2 L11.2 L12.2 L13.2 R218.1 | length 116.3
  TOP w0.254: R218.1 36.474,7.757 37.166,7.757 v1(37.17,7.753)
  L2 w0.5: J30.33 40.316,24.408 40.316,13.866 37.17,10.72 v1(37.17,7.753)
  BOT w0.5: L12.2 24.847,60.266 25.254,60.673 29.292,60.673 ; L13.2 25.086,70.124 25.136,70.174 25.136,70.74 25.889,71.493 28.048,71.493 29.369,70.172 29.369,65.931 ; L10.2@25.279,33.571 25.279,35.552 28.861,39.134 28.861,46.601 ; L11.2 25.711,45.966 26.346,46.601 28.861,46.601 ; 29.292,60.647 29.292,60.673 ; 29.292,65.931 29.292,60.673 ; v2(29.318,59.225) 29.318,60.647 29.292,60.673 ; v2@29.419,59.123 28.861,58.565 28.861,46.601 ; v2@29.496,59.2 32.467,59.2 33.026,58.641 33.15,58.641 38.741,53.049 38.741,31.714 J30.33
SENSB0_1: J7.6 J30.23 R157.1 | length 26.3
  TOP w0.127: 30.041,36.84 30.068,36.868 31.604,36.868 31.674,36.938
  TOP w0.5: J7.6@20.773,28.312 20.973,28.513 20.973,34 23.482,36.508 29.709,36.508 30.041,36.84 ; 31.674,36.938 32.009,37.273 32.009,37.43 33.336,38.757 J30.23
  L2 w0.127: J30.23@33.336,38.935 J30.23
  BOT w0.5: R157.1 18.767,30.317 J7.6@20.773,28.312
SENSB0_2: J7.5 J30.8 R158.1 | length 23.8
  TOP w0.5: J7.5@18.273,28.312 18.473,28.513 18.473,34.556 21.154,37.237 27.734,37.237 J30.8
  L2 w0.127: J30.8@30.527,40.298 J30.8
  BOT w0.5: R158.1 18.212,25.885 18.212,28.252 J7.5@18.273,28.312
SENSB1_1: J7.4 J30.24 R159.1 | length 31.9
  TOP w0.127: 30.057,41.45 30.068,41.439 31.532,41.439
  TOP w0.5: J7.4@15.773,28.312 15.773,34.504 19.132,37.864 26.851,37.864 29.091,40.103 29.091,40.483 30.057,41.45 ; 31.504,41.466 31.532,41.439 31.544,41.426 J30.24
  L2 w0.127: J30.24@33.323,41.439 J30.24
  BOT w0.5: R159.1 14.973,29.49 15.773,28.691 J7.4@15.773,28.312
SENSB1_2: J7.3 J30.9 R160.1 | length 29.8
  TOP w0.5: J7.3@13.273,28.312 13.273,34.556 17.853,39.136 26.857,39.136 29.797,42.077 29.906,42.077 30.417,42.588 J30.9
  BOT w0.5: R160.1 13.235,25.658 13.235,28.275 J7.3@13.273,28.312
SENSB2_1: J8.6 J30.25 R163.1 | length 21.1
  L2 w0.127: 30.059,43.729 31.537,43.729 33.323,43.729 J30.25
  L2 w0.5: J8.6@20.898,40.763 21.018,40.883 21.018,42.463 22.284,43.729 30.059,43.729 30.087,43.756
  L2 w0.508: 31.511,43.756 31.537,43.729 31.55,43.716 J30.25
  BOT w0.5: R163.1@19.031,44.595 19.408,44.217 19.408,43.1 19.564,42.944 19.564,42.097 J8.6@20.898,40.763
SENSB2_2: J8.5 J30.10 R164.1 | length 20.3
  L2 w0.5: J8.5@18.398,40.763 18.218,40.943 18.218,43.375 20.303,45.46 27.993,45.46 28.575,44.878 J30.10
  BOT w0.5: R164.1 17.735,39.721 18.294,40.28 J8.5@18.294,40.581
SENSB3_1: J8.4 J30.26 R165.1 | length 24.5
  L2 w0.127: 30.029,46.085 30.095,46.019 31.537,46.019
  L2 w0.5: J8.4@15.898,40.763 15.898,43.494 18.491,46.087 28.253,46.087 28.255,46.085 30.029,46.085
  L2 w0.508: 31.511,46.046 31.537,46.019 31.55,46.006 J30.26
  BOT w0.5: R165.1 15.567,41.473 15.824,41.216 J8.4@15.907,41.216
SENSB3_2: J8.3 J30.11 R167.1 | length 25.6
  L2 w0.5: J8.3@13.398,40.763 13.621,40.985 13.621,43.629 17.159,47.168 J30.11@30.748,47.168 ; J30.11 J30.11@30.748,47.168 ; J30.11@30.867,47.287 J30.11@30.748,47.168
  BOT w0.5: R167.1 13.379,36.943 13.379,40.746 J8.3@13.392,40.759
SENSB4_1: J11.6 J30.27 R168.1 | length 23.1
  L2 w0.127: 30.095,50.603 31.533,50.603
  L2 w0.5: J11.6@20.973,53.232 20.973,53.111 22.115,51.97
  L2 w0.508: J11.6@20.973,53.232 22.175,52.03 23.602,50.603 30.095,50.603 ; 31.533,50.603 32.127,50.01 32.127,49.508 33.336,48.299 J30.27
  BOT w0.5: R168.1 18.183,56.022 J11.6@20.973,53.232
SENSB4_2: J11.5 J30.12 R169.1 | length 21.1
  TOP w0.5: J11.5@18.473,53.232 20.072,54.831 26.055,54.831 26.327,54.559 26.523,54.559 27.734,53.348 27.734,51.042 29.318,49.458 J30.12
  BOT w0.5: R169.1 17.643,52.023 18.473,52.853 J11.5@18.473,53.232
SENSB5_1: J11.4 J30.28 R171.1 | length 28.8
  TOP w0.127: 30.023,50.644 30.068,50.599 31.761,50.599 33.323,50.599 J30.28
  TOP w0.5: J11.4@15.973,53.232 18.199,55.458 26.511,55.458 28.361,53.608 28.361,52.306 30.023,50.644 ; 31.761,50.586 J30.28@33.323,50.586
  L2 w0.127: J30.28@33.323,50.599 J30.28
  BOT w0.5: R171.1 14.586,58.726 14.586,56.71 15.973,55.323 J11.4@15.973,53.232
SENSB5_2: J11.3 J30.13 R172.1 | length 24.3
  L2 w0.5: J11.3@13.473,53.232 15.936,55.694 26.036,55.694 27.692,54.038 28.318,54.038 30.608,51.748 J30.13
  BOT w0.5: J11.3@13.473,53.232 13.48,53.225 13.48,48.97 R172.1
SENSB6_1: J13.6 J30.29 R176.1 | length 24.6
  L2 w0.127: 30.064,55.183 30.068,55.179 31.268,55.179 31.281,55.166 31.511,55.166
  L2 w0.5: J13.6@20.975,65.653 21.258,65.653 21.939,64.972 21.988,64.972 22.884,64.076 23.721,64.076 27.464,60.333 27.464,57.336 29.633,55.167 30.047,55.167 30.064,55.183
  L2 w0.508: 31.511,55.166 31.589,55.166 31.755,55.001 32.005,54.751 32.005,54.615 32.127,54.493 32.127,54.088 33.336,52.879 J30.29
  BOT w0.5: R176.1 18.758,69.389 20.794,67.353 20.794,65.834 J13.6@20.975,65.653
SENSB6_2: J13.5 J30.14 R177.1 | length 22
  L2 w0.5: J13.5@18.475,65.653 20.301,63.827 20.301,63.301 24.798,58.804 25.11,58.804 29.607,54.306 30.528,54.306 J30.14
  BOT w0.5: R177.1 17.415,61.736 18.294,62.615 18.294,65.473 J13.5@18.475,65.653
SENSB7_1: J13.4 J30.30 R178.1 | length 28.2
  TOP w0.5: J13.4@15.975,65.653 18.35,63.278 28.937,63.278 33.336,58.879 J30.30
  L2 w0.127: J30.30@33.323,55.179 J30.30
  BOT w0.5: R178.1 15.211,66.795 15.975,66.032 J13.4@15.975,65.653
SENSB7_2: J13.3 J30.15 R179.1 | length 25.7
  TOP w0.5: J13.3@13.475,65.653 17.947,61.181 25.48,61.181 26.683,59.977 27.146,59.977 J30.15
  L2 w0.5: J13.3@13.475,65.653 J13.3@13.475,66.032 ; J30.15@30.748,56.375 J30.15
  BOT w0.5: J13.3@13.475,65.653 13.501,65.626 13.501,61.614 R179.1
TECB0+: J30.31 J30.32 J32.5 | length 26.3
  TOP w1: J32.5 28.094,10.295 28.094,12.283 29.575,13.764 29.575,17.276 31.937,19.638 33.928,19.638 35.876,21.586 J30.31 J30.32
TECB0-: J30.1 J30.16 J32.4 | length 26.1
  TOP w1: J32.4 20.497,6.28 27.895,13.678 27.895,18.788 30.107,21 31.229,21 J30.16 33.092,23.106 32.642,23.556 32.627,23.556 32.087,24.096 30.968,24.096 J30.1
TECB1+: J30.2 J30.17 J32.2 | length 33.7
  TOP w1: J32.2 12.893,6.28 14.47,7.857 19.132,7.857 26.737,15.462 26.737,22.5 J30.2 30.968,26.386 32.102,26.386 33.092,25.396 J30.17
TECB1-: J30.3 J30.18 J32.1 | length 37.5
  TOP w1: J32.1 13.6,11.041 18.421,11.041 22.079,14.699 22.079,20.131 J30.3 30.968,28.676 32.102,28.676 33.092,27.686 J30.18
TECB2+: J30.4 J30.19 J34.5 | length 18.9
  L2 w1: J34.5 28.836,23.008 28.836,29.179 J30.4 30.968,30.966 32.102,30.966 33.092,29.976 J30.19
TECB2-: J30.5 J30.20 J34.4 | length 22.7
  L2 w1: J34.4 27.489,25.471 27.489,30.122 J30.5 30.968,33.256 32.102,33.256 33.092,32.266 J30.20
TECB3+: J30.6 J30.21 J34.2 | length 33.5
  L2 w1: J30.6 30.968,35.546 32.102,35.546 33.092,34.556 J30.21
  BOT w1: J34.2 14.284,19.886 23.367,19.886 29.124,25.643 29.124,33.987 30.796,35.658 J30.6
TECB3-: J30.7 J30.22 J34.1 | length 38.5
  BOT w1: J34.1 11.942,21.354 22.993,21.354 27.767,26.128 27.767,34.98 J30.7 30.968,37.836 32.102,37.836 33.092,36.846 J30.22
Vrefb0+: J7.7 J30.37 R155.1 R157.2 R159.2 | length 32
  L2 w0.127: 30.087,36.862 31.515,36.862 ; 32.444,37.831 32.62,38.008 33.172,38.008 ccw(c33.336,39.136) 33.499,38.008 34.044,38.008
  L2 w0.5: J7.7@23.273,28.312 24.798,29.838 24.798,33.876 26.246,35.324 26.694,35.324 28.142,36.771 29.972,36.771 30.075,36.874 ; 31.515,36.862 31.526,36.862 32.009,37.345 32.009,37.396 32.444,37.831 ; 34.044,38.014 34.05,38.008 35.447,38.008 J30.37
  BOT w0.5: R159.2 17.198,33.186 17.198,34.299 17.456,34.556 20.196,34.556 20.542,34.21 20.542,33.212 R157.2 20.78,32.974 22.358,32.974 R155.1 22.371,30.767 23.125,30.012 23.125,28.459 J7.7@23.273,28.312
Vrefb0-: J7.2 J30.38 R156.2 R158.2 R160.2 | length 45.9
  L2 w0.127: 29.8,39.153 31.756,39.153 ; 32.009,39.546 32.149,39.546 ; 32.647,40.277 33.285,40.276 33.286,40.276 cw(c33.336,39.136) 33.388,40.275 33.39,40.275 33.442,40.275 34.061,40.274 34.067,40.281 ; J30.38@35.859,40.274 J30.38@36.366,40.274
  L2 w0.5: J7.2@10.773,28.312 10.773,31.536 16.008,36.771 27.154,36.771 29.536,39.153 29.8,39.153 ; 31.756,39.153 31.756,39.293 32.009,39.546 ; 31.95,39.605 32.149,39.804 32.149,40.003 32.422,40.277 32.647,40.277 ; 34.067,40.281 35.859,40.281 J30.38
  BOT w0.5: R156.2 9.506,25.583 11.16,25.583 R160.2 ; J7.2@10.773,28.312 10.985,28.099 10.985,25.834 R160.2 ; R158.2 16.151,24.494 15.119,23.462 11.941,23.462 11.198,24.205 R160.2
Vrefb1+: J8.7 J30.39 R161.1 R163.2 R165.2 | length 29.1
  L2 w0.127: 30.095,41.439 31.259,41.439 31.286,41.466 31.511,41.466 ; 32.647,42.588 32.668,42.567 34.044,42.567
  L2 w0.5: 34.044,42.588 J30.39
  L2 w0.508: J8.7@23.398,40.763 23.398,41.14 23.948,41.689 23.948,42 24.713,42.766 28.015,42.766 29.342,41.439 30.095,41.439 ; 31.511,41.466 31.533,41.443 32.127,42.037 32.127,42.101 32.489,42.463 ; 32.49,42.463 32.615,42.588
  BOT w0.5: R165.2@17.456,44.112 17.761,44.417 17.761,45.687 18.472,46.398 22.104,46.398 22.676,45.826 R161.1 ; R163.2@21.063,44.671 21.063,44.648 21.408,44.302 22.638,44.302 R161.1 ; J8.7@23.398,40.763 23.398,42.742 ; 23.425,42.715 23.398,42.742 ; R161.1 22.876,44.141 22.876,43.264 23.398,42.742
Vrefb1-: J8.2 J30.40 R162.2 R164.2 R167.2 | length 41.5
  TOP w0.127: 30.045,43.753 30.612,43.753 ccw(c30.796,44.878) 30.979,43.753 31.511,43.753 ; 32.594,44.857 34.063,44.857
  TOP w0.5: J8.2@10.898,40.763 11.03,40.894 11.03,42.842 12.478,44.29 26.454,44.29 26.737,44.006 29.791,44.006 30.045,43.753 ; 34.063,44.857 34.084,44.878 J30.40
  TOP w0.508: 31.511,43.753 31.511,43.711 32.127,44.327 32.127,44.39 32.594,44.857 32.621,44.884
  BOT w0.5: R162.2 9.823,36.975 R167.2@11.309,36.975 ; J8.2@10.877,40.861 11.135,40.603 11.135,37.149 R167.2@11.309,36.975 ; R164.2@15.653,36.949 15.51,36.807 15.51,35.512 15.043,35.044 11.919,35.044 11.36,35.603 R167.2 R167.2@11.309,36.975
Vrefb2+: J11.7 J30.41 R166.1 R168.2 R171.2 | length 31.1
  TOP w0.127: 30.323,46.028 31.504,46.028 ; 32.736,47.019 32.872,47.156 34.072,47.156
  TOP w0.5: J11.7@23.473,53.232 23.473,50.464 26.532,47.406 28.682,47.406 30.087,46 ; 31.504,46.028 31.532,46.028 32.176,46.672 32.176,46.724 32.627,47.174 32.627,47.128 ; 34.044,47.128 34.072,47.156 34.084,47.168 J30.41
  BOT w0.5: R171.2 16.852,58.993 16.852,59.907 17.211,60.266 19.89,60.266 20.183,59.974 R168.2 20.196,58.755 21.634,58.755 R166.1 21.647,55.058 J11.7@23.473,53.232
Vrefb2-: J11.2 J30.42 R169.2 R170.2 R172.2 | length 44
  TOP w0.5: J30.42 J30.42@35.876,49.837
  L2 w0.127: 29.986,48.391 30.25,48.391 30.323,48.318 31.532,48.318 31.55,48.299 ; 32.565,47.184 32.835,47.184 32.863,47.156 34.055,47.156 34.067,47.168
  L2 w0.5: J11.2@10.973,53.232 10.973,51.255 13.837,48.391 29.986,48.391
  L2 w0.508: 31.55,48.299 32.005,47.845 32.005,47.745 32.565,47.184 ; 34.067,47.168 34.09,47.168 34.667,47.745 34.667,48.246 35.876,49.455 J30.42
  BOT w0.5: R170.2 R172.2 ; J11.2@10.973,53.232 10.973,49.727 11.487,49.213 R172.2 ; R169.2 15.643,47.768 14.781,46.906 11.893,46.906 11.528,47.271 11.528,48.922 R172.2
Vrefb3+: J13.7 J30.43 R176.2 R178.2 R180.1 | length 36.3
  TOP w0.127: J13.7@23.475,65.653 J13.7@23.654,65.653 ; J30.43 J30.43@35.876,51.949
  L2 w0.508: J13.7@23.475,65.653 26.601,62.527 28.302,62.527 32.26,58.569 35.943,58.569 37.843,56.669 37.843,53.715 J30.43
  BOT w0.5: R178.2 17.211,70.743 17.504,71.036 20.465,71.036 20.758,70.743 R176.2 20.796,69.677 22.206,69.677 R180.1 22.244,66.884 J13.7@23.475,65.653
Vrefb3-: J13.2 J30.44 R177.2 R179.2 R181.2 | length 52
  TOP w0.5: J13.2@10.975,65.653 11.184,65.653 13.79,68.259 34.185,68.259 37.624,64.821 37.624,55.786 J30.44
  BOT w0.5: R181.2 9.849,61.536 11.478,61.536 R179.2 ; J13.2@10.975,65.653 10.975,63.293 11.487,62.781 11.487,61.629 R179.2 ; R177.2 15.415,61.236 14.445,60.266 12.599,60.266 11.528,61.337 R179.2
pads on no net: B1.1 B2.1 B3.1 B4.1 D36.1 D36.3 FTG1.1 FTG2.1 FTG3.1 FTG4.1 IC28.5 IC33.4

## Polygon pours and split planes (outlines as drawn)
GND on G1 (split plane): 44.403,59.587 44.364,59.524 44.328,59.436 44.306,59.345 44.299,59.25 44.299,17.805 44.306,17.711 44.328,17.619 44.364,17.532 44.403,17.469 44.403,4.125 44.289,4.01 29,4.01 28.9,4.001 28.805,3.972 28.716,3.924 28.639,3.861 25.289,0.51 0.51,0.51 0.51,72.99 44.403,72.99

## Other copper
G1 (plane layer: these items are gaps in the copper):
  lines w1.2: 44.901,17.805 44.901,59.25

## Silkscreen, mask and mechanical layers (free items; w line width, h text height)
TopOverlay:
  text "GND" at 6.873,71.247 h1
  text "SENS7" at 10.671,70.815 h1.2
  text "SENS6" at 18.16,70.815 h1.2
  text "GND" at 7.098,59.307 h1
  text "SENS5" at 10.671,58.077 h1.2
  text "SENS4" at 18.084,58.077 h1.2
  text "GND" at 6.748,46.788 h1
  text "SENS3" at 10.722,45.276 h1.2
  text "SENS2" at 18.134,45.276 h1.2
  text "GND" at 7.223,34.062 h1
  text "SENS1" at 10.831,33.012 h1.2
  text "SENS0" at 18.243,33.012 h1.2
  text "TEC3" at 7.453,13.288 h1.52
  text "GND" at 14.819,13.034 h1
  text "TEC2" at 18.98,12.972 h1.52
  text "P3V3" at 28.467,6.84 h0.6 r90
  text "SCL" at 29.568,6.84 h0.6 r90
  text "SDA" at 30.669,6.84 h0.6 r90
  text "WUT ISE / CTI 2024" at 4.525,6.613 h0.8 r90
  text "Thermostat EEM Breakout v1.0.1" at 2.736,6.196 h0.8 r90
  text "GND" at 38.002,4.688 h0.6 r90
  text "TEC1" at 7.939,1.415 h1.52
  text "GND" at 15.174,1.415 h1
  text "TEC0" at 19.392,1.415 h1.52
BottomOverlay:
  drawing of 1237 lines, arcs and shapes, not listed
  text "WUT ISE / CTI 2024" at 38.621,28.925 h1.02 r270
  text "Thermostat EEM breakout board v1.0.1" at 41.385,13.85 h1.25 r270
Mechanical1:
  drawing of 304 lines, arcs and shapes, not listed
  text "Layer" at 72.274,55.098 h1.52
  text "Name" at 82.686,55.098 h1.52
  text "Material" at 104.778,55.098 h1.52
  text "Thickness" at 126.616,55.098 h1.52
  text "Constant" at 143.122,55.098 h1.52
  text "Board Layer Stack" at 157.596,55.098 h1.52
  text "TopOverlay" at 82.686,52.05 h1.52
  text "TopSolder" at 82.686,49.002 h1.52
  text "Solder Resist" at 104.778,49.002 h1.52
  text "0.010mm" at 126.616,49.002 h1.52
  text "3.5" at 143.122,49.002 h1.52
  text "1" at 72.274,45.954 h1.52
  text "TOP" at 82.686,45.954 h1.52
  text "0.035mm" at 126.616,45.954 h1.52
  text "Dielectric1" at 82.686,42.906 h1.52
  text "FR-4" at 104.778,42.906 h1.52
  text "0.180mm" at 126.616,42.906 h1.52
  text "4.8" at 143.122,42.906 h1.52
  text "2" at 72.274,39.858 h1.52
  text "G1" at 82.686,39.858 h1.52
  text "CF-004" at 104.778,39.858 h1.52
  text "0.035mm" at 126.616,39.858 h1.52
  text "Dielectric2" at 82.686,36.81 h1.52
  text "Core-042" at 104.778,36.81 h1.52
  text "1.050mm" at 126.616,36.81 h1.52
  text "4.6" at 143.122,36.81 h1.52
  text "3" at 72.274,33.762 h1.52
  text "L2" at 82.686,33.762 h1.52
  text "CF-004" at 104.778,33.762 h1.52
  text "0.035mm" at 126.616,33.762 h1.52
  text "Dielectric3" at 82.686,30.714 h1.52
  text "FR-4" at 104.778,30.714 h1.52
  text "0.180mm" at 126.616,30.714 h1.52
  text "4.8" at 143.122,30.714 h1.52
  text "4" at 72.274,27.666 h1.52
  text "BOT" at 82.686,27.666 h1.52
  text "0.035mm" at 126.616,27.666 h1.52
  text "BottomSolder" at 82.686,24.618 h1.52
  text "Solder Resist" at 104.778,24.618 h1.52
  text "0.010mm" at 126.616,24.618 h1.52
  text "3.5" at 143.122,24.618 h1.52
  text "BottomOverlay" at 82.686,21.57 h1.52

## Text inside footprints (layer, text, board x,y; h text height)
J30: TopOverlay "15" at 30.136,59.588 h1.2 r270; TopOverlay "31" at 35.236,22.688 h1.2 r270; TopOverlay "44" at 35.336,57.588 h1.2 r270; TopOverlay "30" at 32.736,58.588 h1.2 r270; TopOverlay "1" at 30.136,22.588 h1.2 r270; Mechanical14 "15" at 30.136,59.588 h1.2 r270; Mechanical14 "31" at 35.236,22.688 h1.2 r270; Mechanical14 "44" at 35.336,57.588 h1.2 r270; Mechanical14 "30" at 32.736,58.588 h1.2 r270; Mechanical14 "1" at 30.136,22.588 h1.2 r270; Mechanical8 "PCB Edge" at 42.936,43.088 h1 r270
J32: TopOverlay "1" at 8.564,10.88 h1; TopOverlay "2" at 12.374,10.88 h1; TopOverlay "3" at 16.184,10.88 h1; TopOverlay "4" at 19.994,10.88 h1; TopOverlay "5" at 23.804,10.88 h1
J34: TopOverlay "1" at 8.433,22.719 h1; TopOverlay "2" at 12.243,22.719 h1; TopOverlay "4" at 19.863,22.719 h1; TopOverlay "5" at 23.673,22.719 h1